# Altium PCB 5V-25V to 12V3A DC-DC Converter.PcbDoc
Units mm, origin at the board's own origin, x right, y up, seen from the top; angles counter-clockwise.
Board outline 34.42 x 23.44 mm, 2 copper layers (Top Layer, Bottom Layer); 29 components, 18 nets, 80 pads, 19 vias.
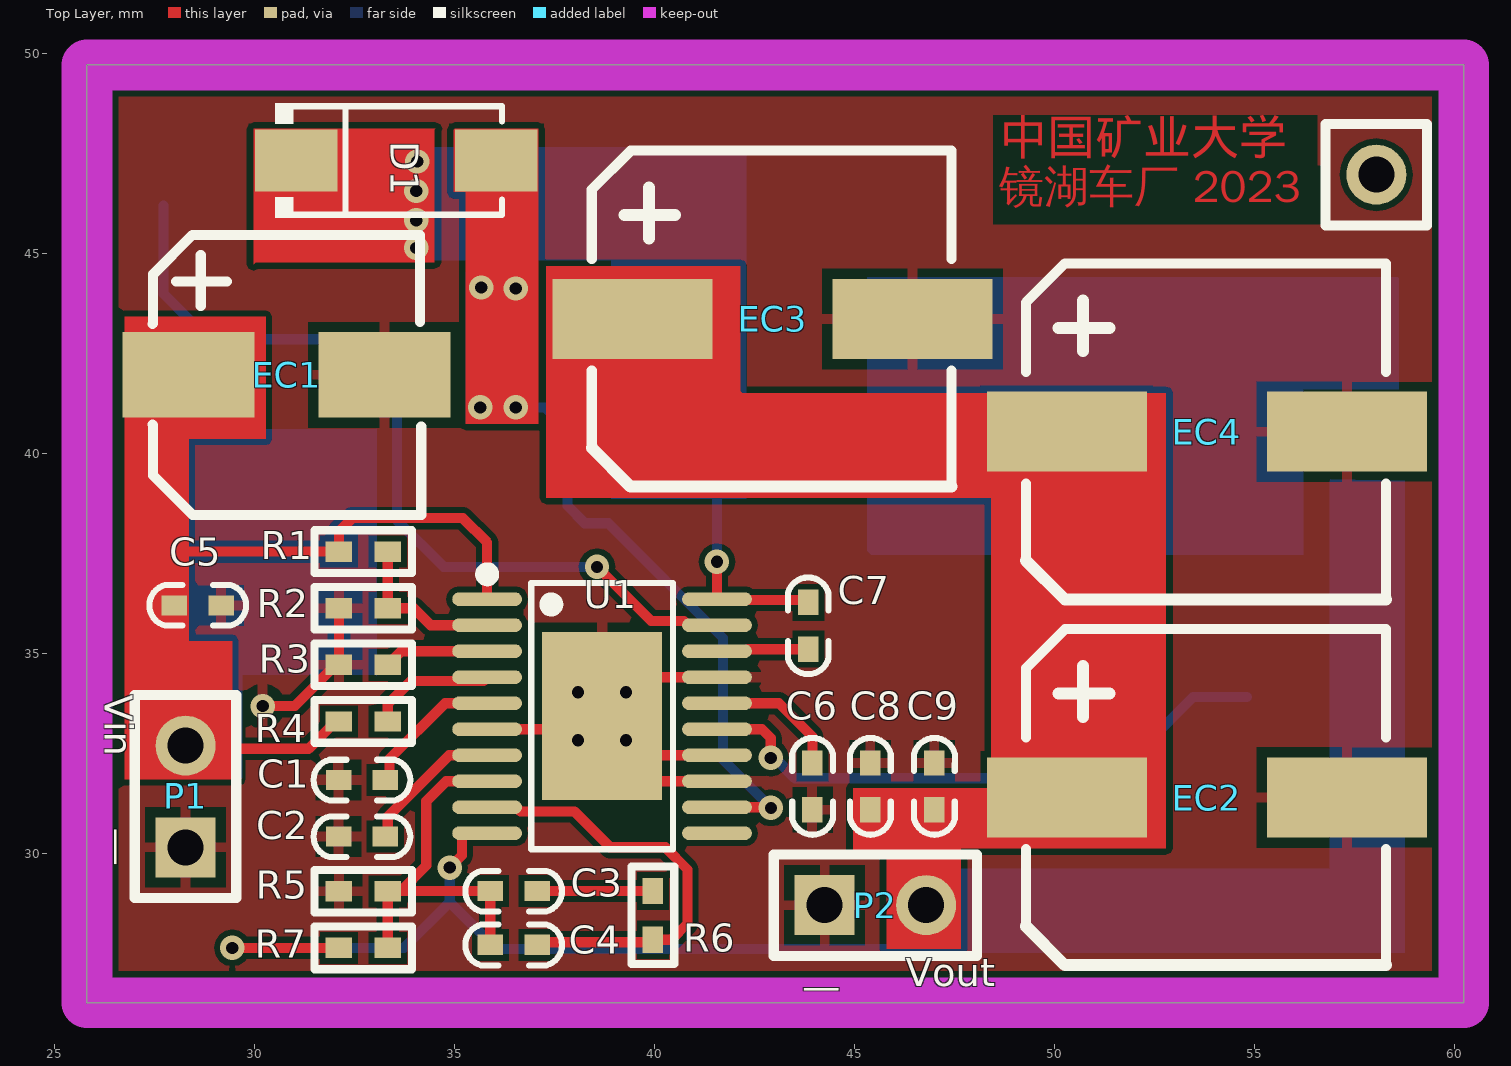
[diagram p0: Top Layer view]
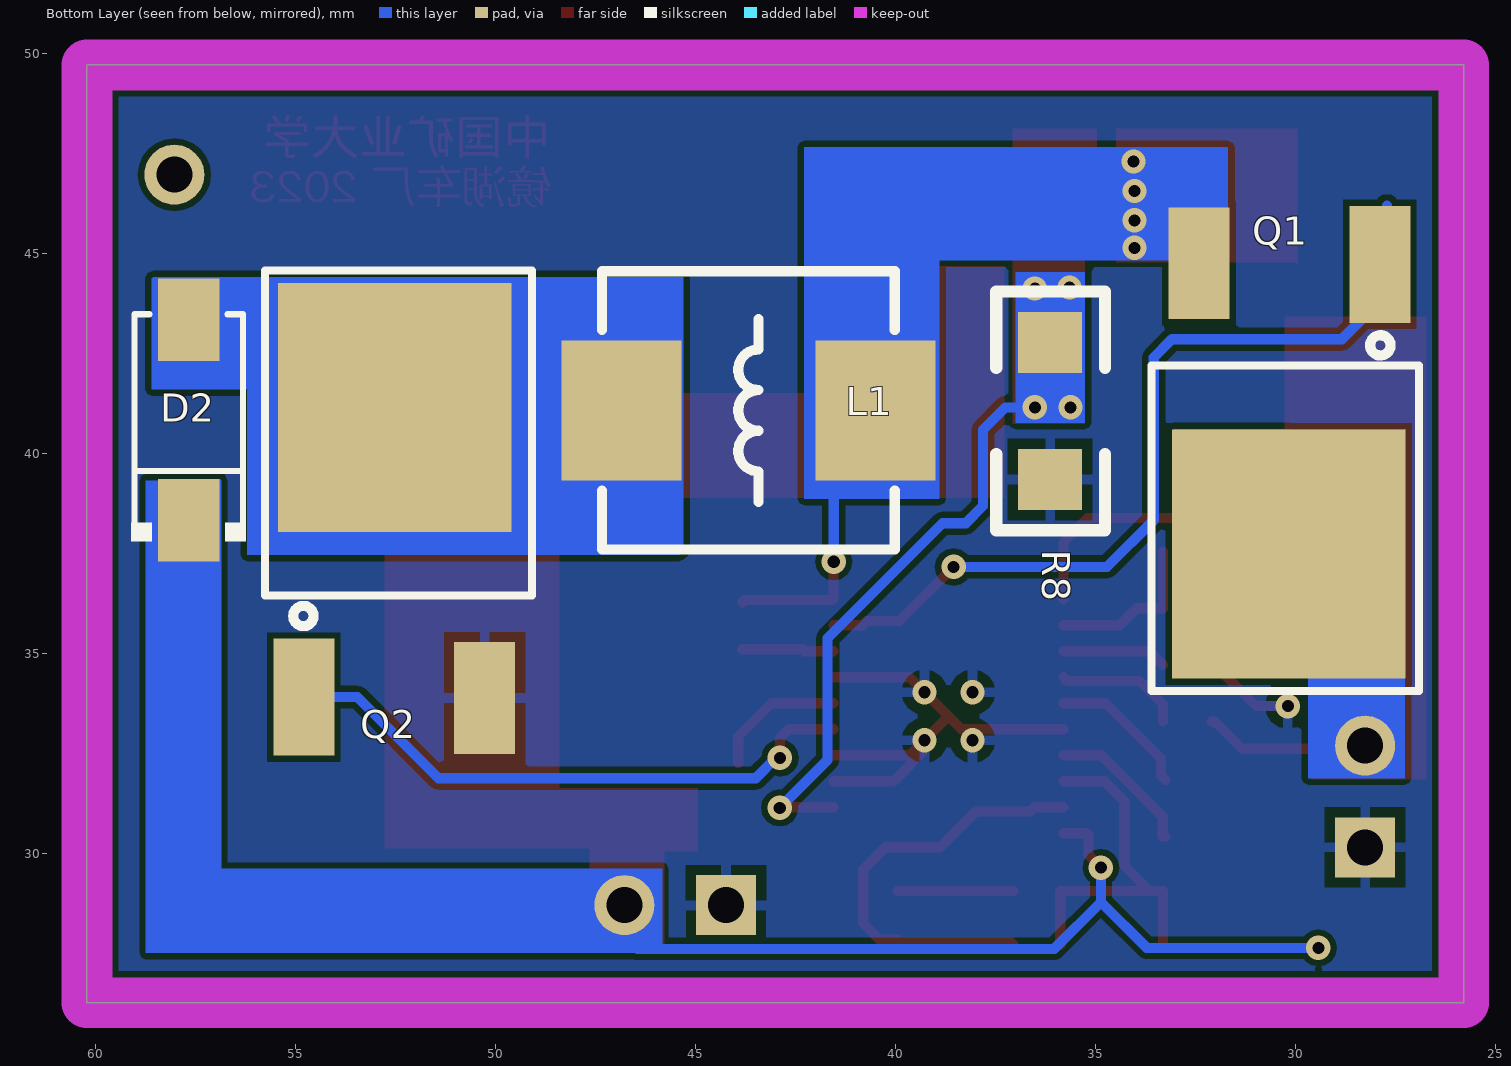
[diagram p1: Bottom Layer view, seen from below]
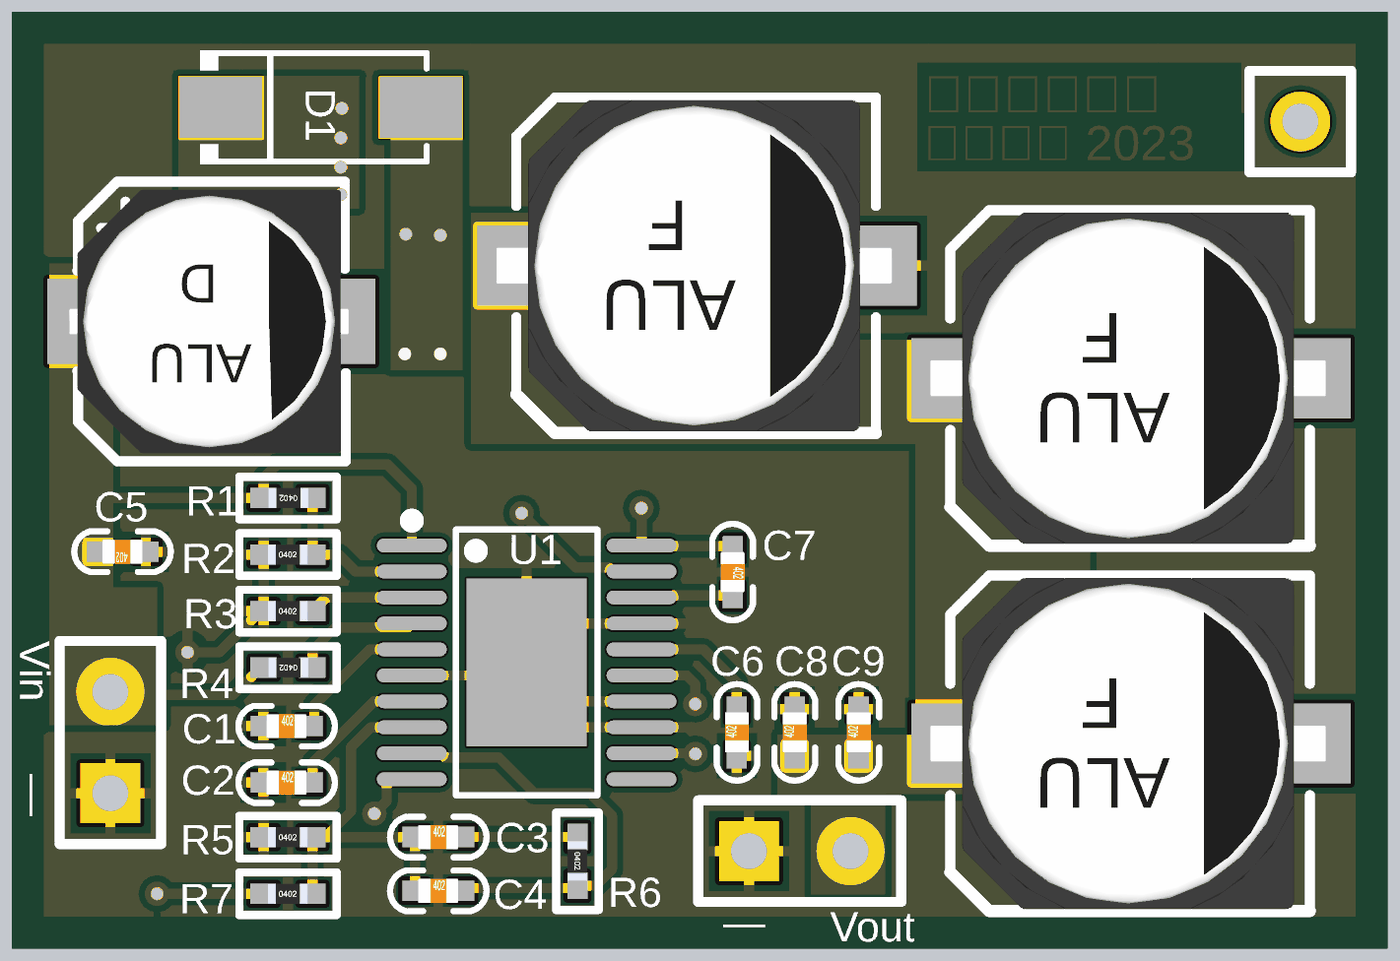
[diagram p2: 3D render of the assembled board from above, using the file's embedded part models]
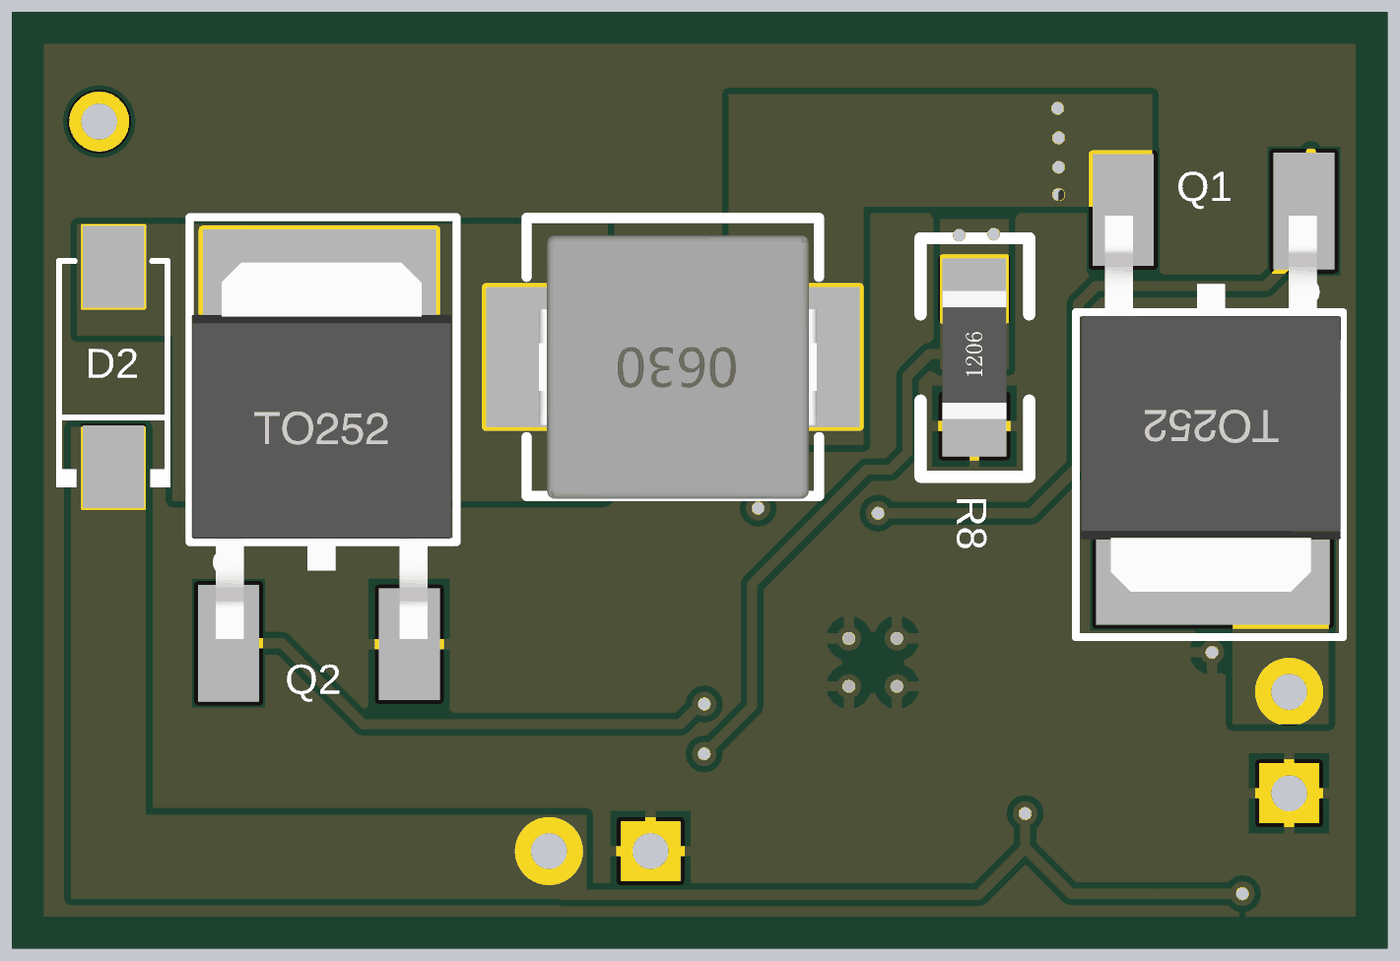
[diagram p3: 3D render of the assembled board from below, using the file's embedded part models]

## Layer stack, top to bottom
Top Solder: solder mask 0.0102, Solder Resist, Dk 3.5
Top Layer: signal copper 0.0356
Dielectric 1: dielectric 0.32, FR-4, Dk 4.8
Bottom Layer: signal copper 0.0356
Bottom Solder: solder mask 0.0102, Solder Resist, Dk 3.5

## Board outline
25.806,26.264 60.223,26.264 60.223,49.708 25.806,49.708

## Design rules (kind name [scope] priority, off if disabled: settings)
Clearance [All] p1: gap=0.152 ignorepadtopadclearanceinfootprint=FALSE except(0: Arc-Hole Track-Hole SMDPad-Hole THPad-Hole Via-Hole Fill-Hole Poly-Hole Region-Hole Text-Hole)
HoleSize [All] p1: absolutevalues=TRUE maxlimit=3 minlimit=0.025 maxpercent=80.000 minpercent=20.000
HoleToHoleClearance [All] p1: gap=0 allowstackedmicrovias=TRUE
MinimumSolderMaskSliver [All] p1: minsoldermaskwidth=0
PolygonConnect [All] p1: connectstyle=Relief reliefconductorwidth=0.254 reliefentries=4 polygonreliefangle="90 Angle" airgapwidth=0.254
RoutingVias [All] p1: holewidth=0.61 width=0.305 viastyle="Through Hole" minholewidth=0.61 minwidth=0.305 maxholewidth=5.08 maxwidth=5.08
SilkToSilkClearance [All] p1: silktosilkclearance=0
SilkToSolderMaskClearance [IsPad] p1: minsilkscreentomaskgap=0 clearancetoexposedcopper=TRUE
SolderMaskExpansion [All] p1: expansion=0.102
Width [All] p1: maxlimit=1.27 minlimit=0.254 preferedwidth=0.254 minimp=50.000000 maximp=50.000000 favimp=50.000000
25 further rules are at their usual default settings.

## Components (designator, comment, footprint, x,y, rotation, side; value= is the part's Value field where it differs from the comment)
C1 "470pF" 0402C 32.045,31.83 r0 top
C2 "22nF" 0402C 32.045,30.415 r0 top
C3 "47nF" 0402C 35.839,29.054 r0 top
C4 "680pF" 0402C 35.839,27.707 r0 top
C5 "100nF" 0402C 29.21,36.199 r180 top
C6 "1uF" 0402C 43.946,31.039 r90 top
C7 "100nF" 0402C 43.836,36.322 r270 top
C8 "470nF" 0402C 45.394,31.039 r90 top
C9 "470nF" 0402C 46.994,31.039 r90 top
D1 "SS54" 肖特基二极管SS54 33.539,47.32 r0 top
D2 "SS54" 肖特基二极管SS54 57.683,40.829 r90 bottom
EC1 "50uF" SMD-EC6.3X6.3X10 28.326,41.96 r0 top
EC2 "100uF" SMD-EC8X8X10 57.16,31.521 r0 top
EC3 "100uF" SMD-EC8X8X10 46.304,43.485 r0 top
EC4 "100uF" SMD-EC8X8X10 57.16,40.665 r0 top
L1 "6.8uH" 0630L 40.64,41.072 r0 bottom
P1 "Header 2" HDR1X2 28.27,30.15 r90 top
P2 "Header 2" HDR1X2 44.247,28.702 r0 top
Q1 "MS60N03" TO252 28.016,44.729 r0 bottom
Q2 "MS60N03" TO252 54.686,33.9 r180 bottom
R1 "27.4k" 0402R 33.325,37.541 r180 top
R2 "12.1k" 0402R 32.106,36.126 r0 top
R3 "18.7k" 0402R 32.106,34.711 r0 top
R4 "1M" 0402R 33.325,33.296 r180 top
R5 "1k" 0402R 32.106,29.05 r0 top
R6 "15.4k" 0402R 39.954,29.058 r270 top
R7 "8.66k" 0402R 32.106,27.635 r0 top
R8 "10m" 1206R 36.144,39.345 r90 bottom
U1 "LM25118MHX/NOPB" LM25118 38.684,33.426 r270 top

## Footprints (in the part's own frame and the unit in brackets; to place one, negate y for a bottom-side part, rotate by r counter-clockwise, add the part's x,y. Pads: shape width x height; smd on the part's side, far side on the other; paste and mask are expansions set on the pad)
0402C [mil]
  rect 25x20 smd: 1(2,0.16) 2(48,0.16)
  silkscreen extent -23,-20 73,20, body extent 5,-12 45,12, height 8
0402R [mil]
  rect 26x20 smd: 1(0,0) 2(48,0)
  silkscreen extent -24,-21 72,21, body extent 4,-10 43,10, height 13
0630L [mm]
  rect 3x3.5 smd: 1(-0.127,0) 2(6.223,0)
  silkscreen extent -0.61,-3.48 6.71,3.48, body extent -0.55,-3.05 6.4,3.55, height 3.05
1206R [mil]
  rect 60x62.99 smd: 1(0,0) 2(135,0)
  silkscreen extent -50,-54 185,53, body extent 7,-31 133,31, height 24
HDR1X2 [mm] "Connector; Header; 2 Position"
  rect 1.5x1.5 hole 0.9: 1(0,0)
  round 1.5 hole 0.9: 2(2.54,0)
  silkscreen extent -1.27,-1.27 3.81,1.27
LM25118 [mm]
  oval 0.343x1.747 smd mask+0.051: 1(-2.925,-2.873) 2(-2.275,-2.873) 3(-1.625,-2.873) 4(-0.975,-2.873) 5(-0.325,-2.873) 6(0.325,-2.873) 7(0.975,-2.873) 8(1.625,-2.873) 9(2.275,-2.873) 10(2.925,-2.873) 11(2.925,2.873) 12(2.275,2.873) 13(1.625,2.873) 14(0.975,2.873) 15(0.325,2.873) 16(-0.325,2.873) 17(-0.975,2.873) 18(-1.625,2.873) 19(-2.275,2.873) 20(-2.925,2.873)
  rect 4.2x3 smd mask+0.051: 21(0,0)
  silkscreen extent -3.7,-3.02 3.33,1.77
SMD-EC6.3X6.3X10 [mm]
  rect 3.3x2.132 smd: 1(0.021,0) 2(4.921,0)
  silkscreen extent -0.88,-3.5 5.84,3.5, body extent -1.09,-3.3 5.91,3.3, height 5.4
SMD-EC8X8X10 [mm]
  rect 4x2 smd: 1(-6.858,-0.127) 2(0.142,-0.127)
  silkscreen extent -7.88,-4.32 1.12,4.08, body extent -8.38,-4.28 1.52,4.02, height 10.2
TO252 [mil] "252晶体管"
  rect 230x245 smd: D(85,285.35)
  rect 60x115 smd: G(-4.55,0.23)
  rect 60x110 smd: S(173.45,-0.77)
  silkscreen extent -43,70 220,420, body extent -41,5 215,375, height 91
肖特基二极管SS54 [mm]
  rect 2.063x1.539 smd mask+0.051: 1(2.504,0) 2(-2.504,0)
  silkscreen extent -3.03,-1.43 2.65,1.43

## Part data
C1 C2 C3 C4 C5 C6 C7 C8 C9: library part CAP, "无极性电容"
D1 D2: library part "DIODE SCHOTTKY", "肖特基二极管"
EC1 EC2 EC3 EC4: library part SMD_ECAP, "贴片电解电容"
L1: library part INDUCTOR, "INDUCTOR"
P1 P2: "Header, 2-Pin", LatestRevisionDate=17-Jul-2002, LatestRevisionNote="Re-released for DXP Platform.", Publisher="Altium Limited"
Q1 Q2: library part N-MOS, "N沟道场效应管"
R1 R2 R3 R4 R5 R6 R7: library part RES
R8: library part RES, "P>0.2w"
U1: Input Voltage=3V~42V, JLCPCB Part Class="Extended Part", LCSC Part Name="降压型 升压Ð", Manufacturer=TI(德Ö, Operating Temperature=-40℃~+125℃@(, Switching Frequency=500kHz, Add into BOM=yes, Convert to PCB=yes, Datasheet=https://atta.szlcsc.com/upload/public/pdf/source/20191219/C470962_B4E0B445A5DDC9BDA17A6FD2A579B975.pdf, Device=LM25118MHX/NOPB, Duty Cycle (Max)=75%, Function=升压, Manufacturer Part=LM25118MHX/NOPB, Name=LM25118MHX/NOPB, Number of Outputs=1, Supplier=LCSC, Supplier Footprint=HTSSOP-20-EP, Supplier Part=C470962, Symbol=LM25118MHX/NOPB, Synchronous Rectification=否, Topology=升压

## Free pads (board coordinates)
  round 1.5 hole 0.9 mask+0.05: 2(58.039,46.965)

## Via types
v1: diameter 0.61, hole 0.305, Top Layer to Bottom Layer, tented both sides, 15 vias
v2: diameter 0.61, hole 0.305, Top Layer to Bottom Layer, 4 vias

## Nets (pads, with @x,y where several pads share a name; then routed paths per layer and width w, separated by ;. In a path a pad name is that pad's centre, name@x,y a point inside that pad or via, vN(x,y) a via of type N, cw(c..) or ccw(c..) an arc to the next point about the centre after c; other vN are vias at no path point)
GND: C1.1 C2.1 C5.1 C6.1 C8.2 C9.2 EC1.2 EC2.2 EC3.2 EC4.2 P1.1 P2.1 Q2.S R2.1 R3.1 R5.1 R8.1 U1.6 U1.13 U1.14 U1.17 U1.21 | length 16.1
  Top Layer w0.254: v1(30.201,33.68) 30.999,33.68 32.029,34.711 R3.1 R2.1 ; U1.6 38.359,33.101 U1.21 ; U1.21@39.158,32.7 40.057,31.801 U1.13 ; U1.14 39.659,32.451 v2(39.284,32.826) U1.21 ; U1.17 39.659,34.402 v2(39.284,34.026) U1.21
  other v2: 38.084,32.826 38.084,34.026
NetC1_2: C1.2 U1.5 | length 3.6
  Top Layer w0.254: C1.2 33.37,31.94 33.37,32.362 34.76,33.751 U1.5
NetC2_2: C2.2 U1.7 | length 3.7
  Top Layer w0.254: C2.2 33.328,30.419 33.328,30.915 34.864,32.451 U1.7
NetC3_1: C3.1 C4.1 R5.2 R7.2 U1.8 | length 9.6
  Top Layer w0.254: R7.2 R5.2 33.328,29.054 R5.2@33.651,29.054 ; U1.8 34.789,31.801 34.29,31.302 34.29,29.693 R5.2@33.651,29.054 ; C4.1 C3.1 35.887,29.054 R5.2@33.651,29.054
NetC3_2: C3.2 R6.1 | length 2.9
  Top Layer w0.254: C3.2 R6.1
NetC4_2: C4.2 R6.2 U1.9 | length 11
  Top Layer w0.254: U1.9 36.537,31.151 36.641,31.047 37.99,31.047 38.887,30.15 40.263,30.15 40.818,29.595 40.818,28.245 40.411,27.838 R6.2 39.891,27.775 37.122,27.775 C4.2
NetC6_2: C6.2 U1.16 | length 3.4
  Top Layer w0.254: U1.16 43.109,33.751 43.942,32.918 C6.2
NetC7_1: C7.1 D1.2 L1.1 Q1.S U1.20 | length 7.5
  Top Layer w0.254: v1(41.554,37.287) 41.557,37.284 U1.20 41.574,36.334 43.777,36.334 C7.1
  Bottom Layer w0.254: L1.1 41.554,40.03 v1(41.554,37.287)
  other v1: 34.036,45.136 34.036,45.822 34.036,46.558 34.061,47.295
NetC7_2: C7.2 U1.18 | length 2.3
  Top Layer w0.254: U1.18 42.283,35.051 42.335,35.103 C7.2
NetD1_1: D1.1 R8.2 U1.12 | length 14.8
  Top Layer w0.254: U1.12 42.89,31.151 v1(42.905,31.136)
  Bottom Layer w0.254: v1(36.525,41.148) 37.262,41.148 37.821,40.589 37.821,38.684 38.252,38.252 38.837,38.252 41.707,35.382 41.707,32.334 v1(42.905,31.136)
  other v1: 35.636,41.148 36.525,44.12 35.662,44.145
NetD2_1: D2.1 L1.2 Q2.D
NetQ1_G: Q1.G U1.19 | length 21.9
  Top Layer w0.254: v1(38.557,37.16) 39.912,35.806 40.727,35.806 40.832,35.701 U1.19
  Bottom Layer w0.254: 27.723,46.197 27.723,43.981 28.854,42.85 33.1,42.85 33.553,42.396 33.553,38.329 34.722,37.16 v1(38.557,37.16)
NetQ2_G: Q2.G U1.15 | length 14.9
  Top Layer w0.254: U1.15 42.681,33.101 42.901,32.882 v1(42.901,32.385)
  Bottom Layer w0.254: v1(42.901,32.385) 42.997,32.385 43.505,31.877 51.435,31.877 53.464,33.906 Q2.G
NetR1_1: R1.1 R2.2 U1.2 | length 4.1
  Top Layer w0.254: R1.1 R2.2 33.978,36.126 34.403,35.701 U1.2
NetR3_2: R3.2 U1.3 | length 2.6
  Top Layer w0.254: R3.2 33.665,35.051 U1.3
NetR4_1: R4.1 U1.4 | length 3.2
  Top Layer w0.254: R4.1 33.325,33.732 33.898,34.305 35.714,34.305 U1.4
Vin: C5.2 EC1.1 P1.2 Q1.D R1.2 R4.2 U1.1 | length 13.5
  Top Layer w0.254: 27.965,37.617 28.042,37.541 R1.2 32.106,38.049 32.436,38.379 35.204,38.379 35.811,37.773 U1.1 ; 29.108,32.614 31.347,32.614 32.029,33.296 R4.2
Vout: C8.1 C9.1 D2.2 EC2.1 EC3.1 EC4.1 P2.2 R7.1 U1.10 | length 23.1
  Top Layer w0.254: v1(29.439,27.635) R7.1 ; v1(34.874,29.642) 35.181,29.949 35.181,30.46 35.222,30.501 U1.10
  Bottom Layer w0.254: v1(29.439,27.635) 33.731,27.635 34.874,28.778 ; v1(34.874,29.642) 34.874,28.778 ; 46.457,27.61 36.043,27.61 34.874,28.778
pads on no net: U1.11

## Polygon pours and split planes (outlines as drawn)
GND on Bottom Layer "Bottom Layer-GND" (solid, remove dead copper, pour order 38): 25.806,49.708 60.223,49.708 60.223,26.264 25.806,26.264
no net on Bottom Layer "Bottom Layer-No Net" (solid, pour order 32): 26.365,53.873
GND on Top Layer "Top Layer-GND" (solid, remove dead copper, pour order 42): 25.806,49.708 60.223,49.708 60.223,26.264 25.806,26.264

## Keep-outs
Keep-Out Layer:
  the board outline again, w1.27

## Other copper
Top Layer:
  region net NetD1_1: 35.281,40.742 37.084,40.742 37.084,48.108 35.001,48.108 34.976,48.082 34.976,46.533 35.281,46.533
  region: 35.001,48.108
  region net NetC7_1: 29.972,48.108 34.519,48.108 34.493,48.082 34.493,44.78 30.023,44.78 29.972,44.729
  region net Vout: 48.412,31.623 44.958,31.623 44.958,30.048 45.796,30.048 45.796,27.61 47.65,27.61 47.65,30.124 52.781,30.124 52.781,41.504 42.189,41.504 42.139,41.554 42.139,44.679 37.287,44.679 37.287,44.475 37.287,38.887 48.412,38.887
  region: 44.983,31.623
  region net Vin: 29.616,31.852 29.616,33.757 29.439,33.934 29.439,35.306 28.346,35.306 28.346,40.361 30.277,40.361 30.277,43.409 26.746,43.409 26.746,43.231 26.746,31.852
  text "中国矿业大学" at 48.614,47.193 h1.5
  text "镜湖车厂 2023" at 48.616,45.999 h1.4
Bottom Layer:
  region net Vin: 27.254,40.589 27.28,40.564 27.28,31.877 29.693,31.877 29.693,34.468 33.02,34.468 33.045,34.442 33.045,40.615
  region net NetD1_1: 35.281,44.526 35.281,40.767 37.008,40.767 37.008,44.526
  region net Vout: 56.896,39.345 56.871,39.319 56.871,29.616 45.847,29.616 45.847,27.508 58.75,27.508 58.75,39.319
  region net NetD2_1: 45.314,44.399 58.572,44.399 58.598,44.374 58.598,41.605 56.185,41.605 56.21,41.58 56.21,37.465 45.415,37.465 45.314,37.567
  region net NetC7_1: 31.699,47.65 42.291,47.65 42.291,38.862 38.913,38.862 38.913,44.831 31.699,44.831

## Silkscreen, mask and mechanical layers (free items; w line width, h text height)
Top Overlay:
  lines w0.254: 27,28.88 27,33.96 29.54,33.96 29.54,28.88 27,28.88 ; 42.977,27.432 42.977,29.972 48.057,29.972 48.057,27.432 42.977,27.432 ; 56.769,45.695 59.309,45.695 59.309,48.235 56.769,48.235 56.769,45.695
  text "Vin" at 26.01,33.96 h1.2 r270
  text "—" at 26.01,30.632 h1.2 r270
  text "—" at 44.653,27.102 h1.2 r180
  text "Vout" at 46.279,26.441 h1.2